# Altium PCB GPS-Module.PcbDoc (part 1 of 2)
Units mil, origin at the board's own origin, x right, y up, seen from the top; angles counter-clockwise.
Board outline 1574.8 x 1665 mil, 4 copper layers (Top Layer, Int1 (GND), Int2 (PWR), Bottom Layer), stack 60.119 mil thick; 48 components, 36 nets, 261 pads, 21 vias.
Unrouted connection lines stored in the file: 132.
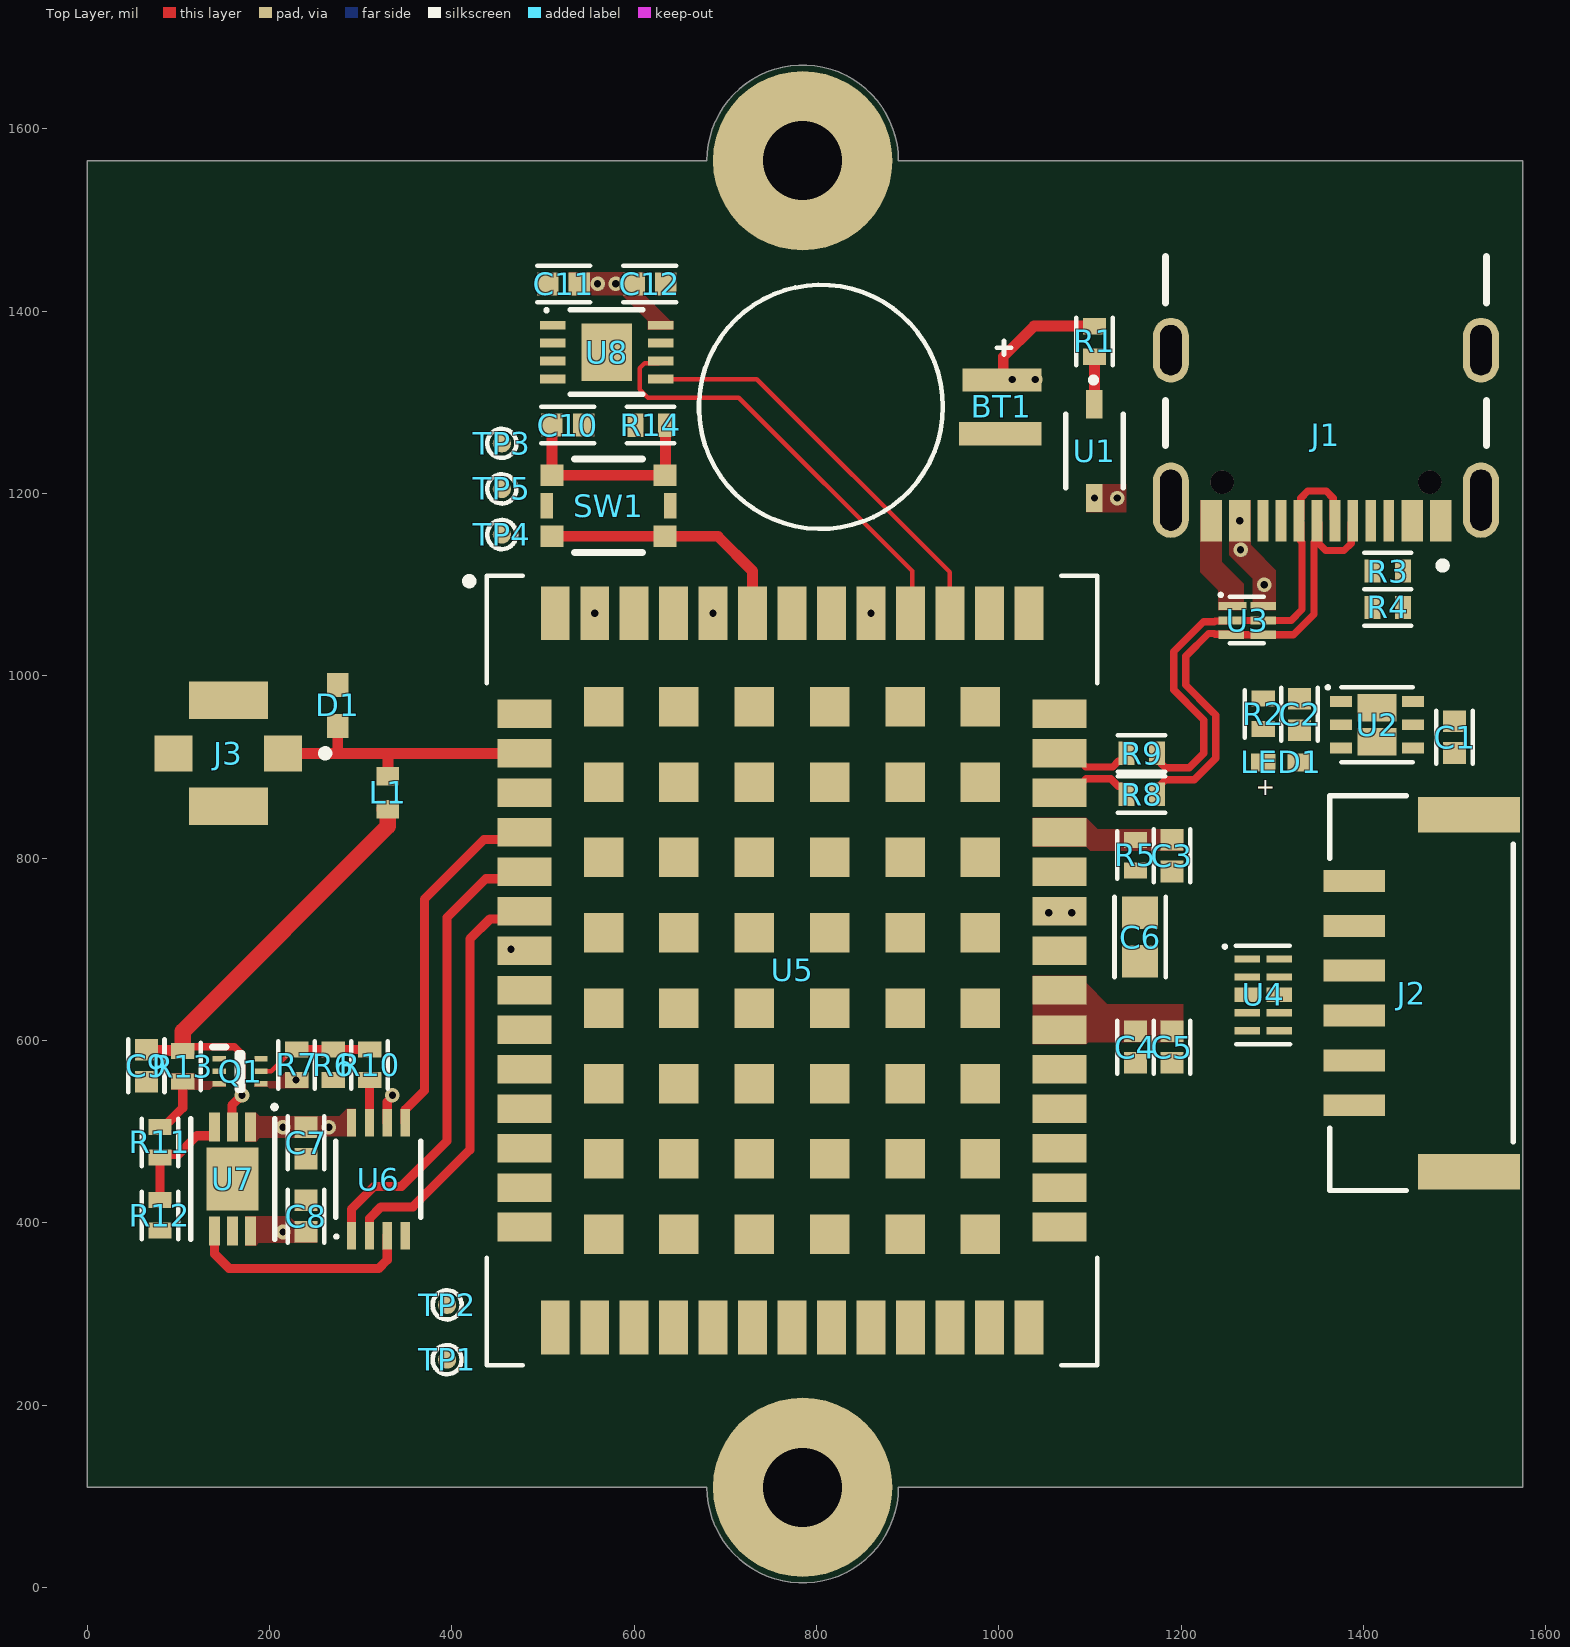
[diagram p0: Top Layer view]
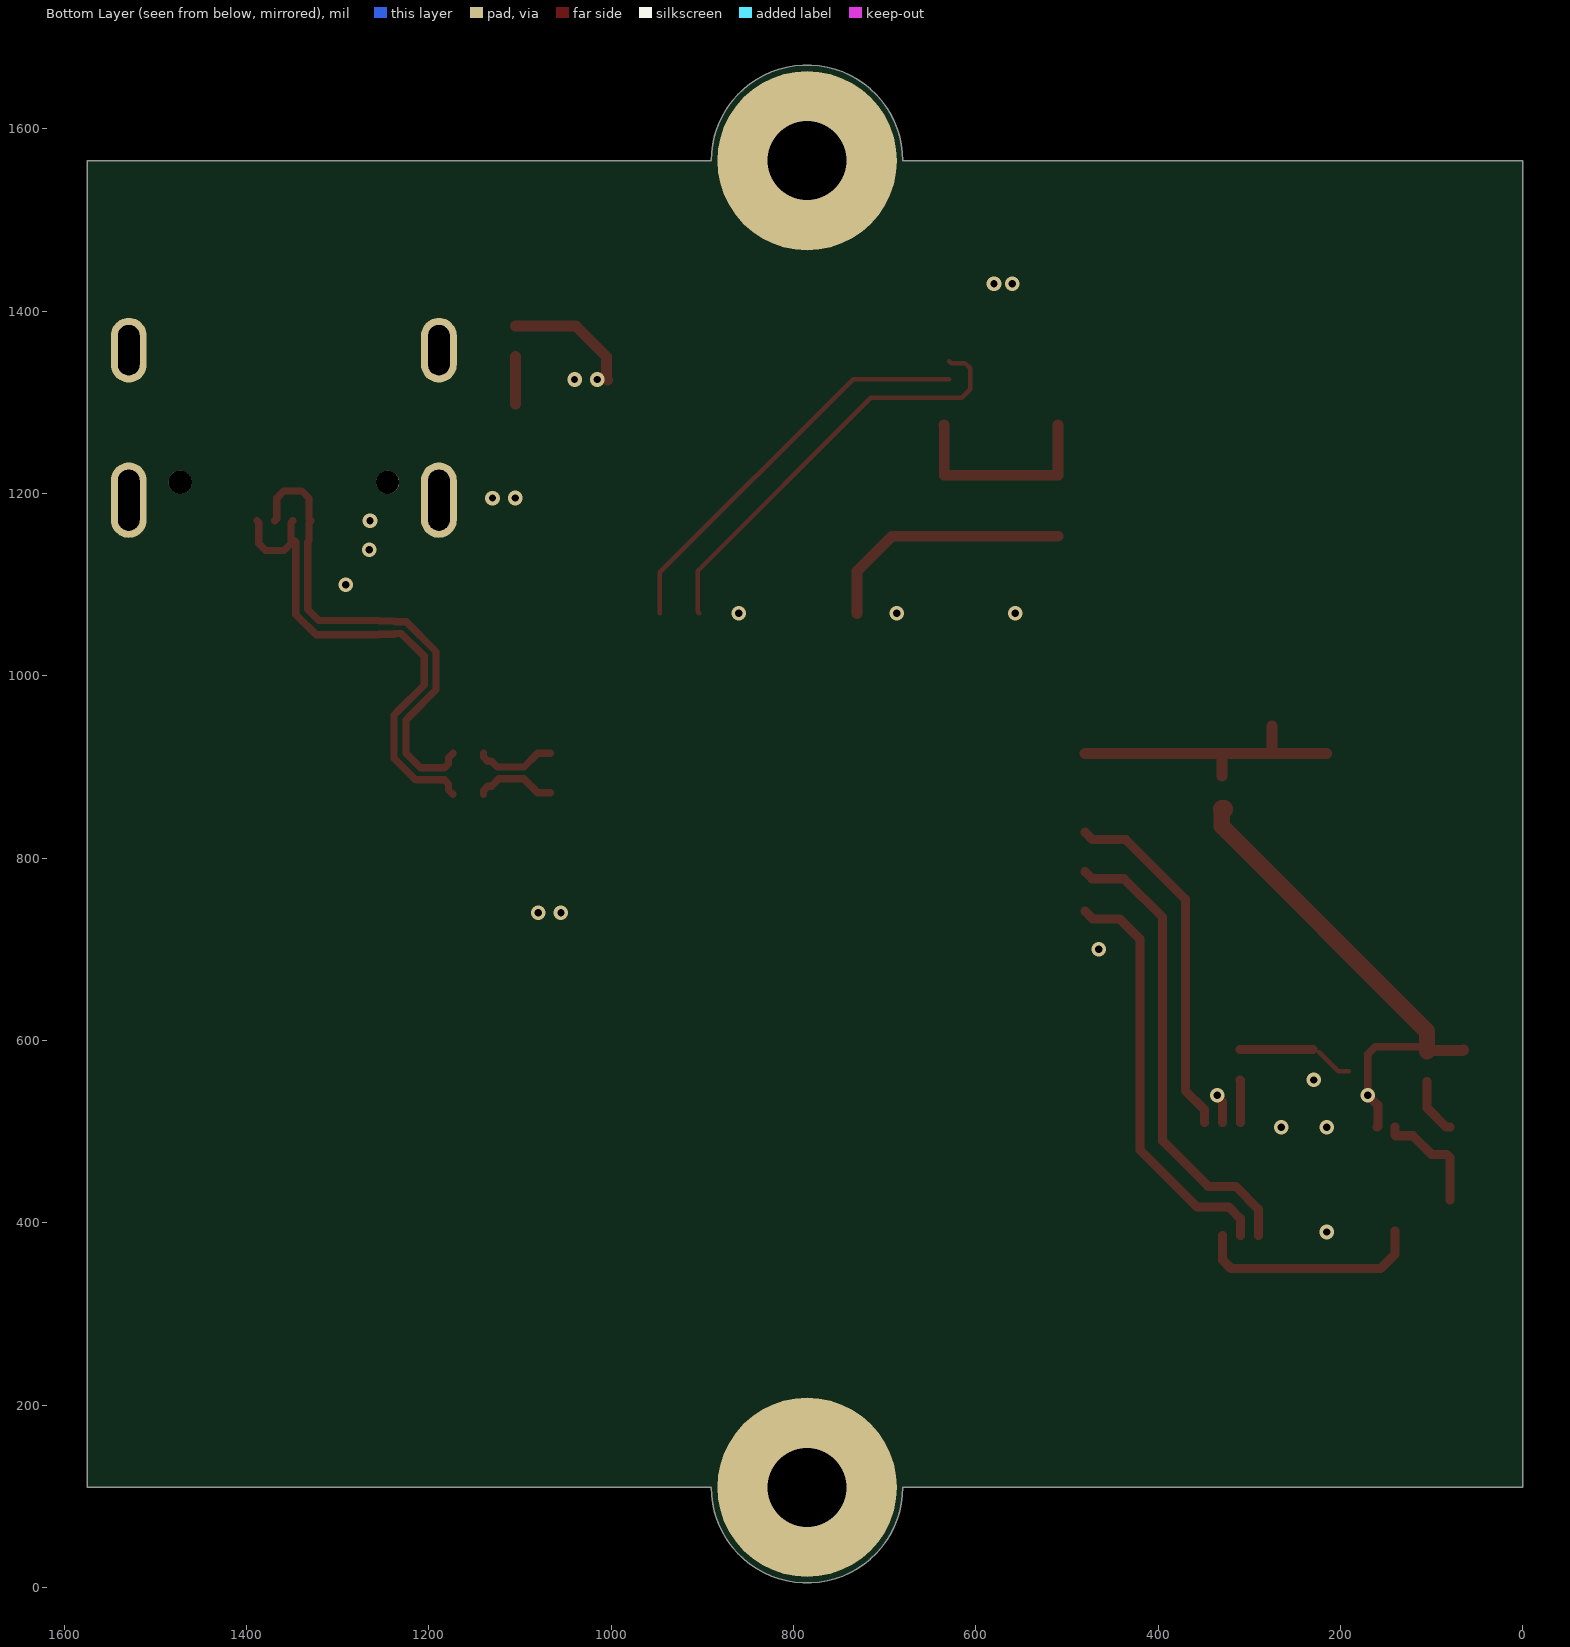
[diagram p1: Bottom Layer view, seen from below]
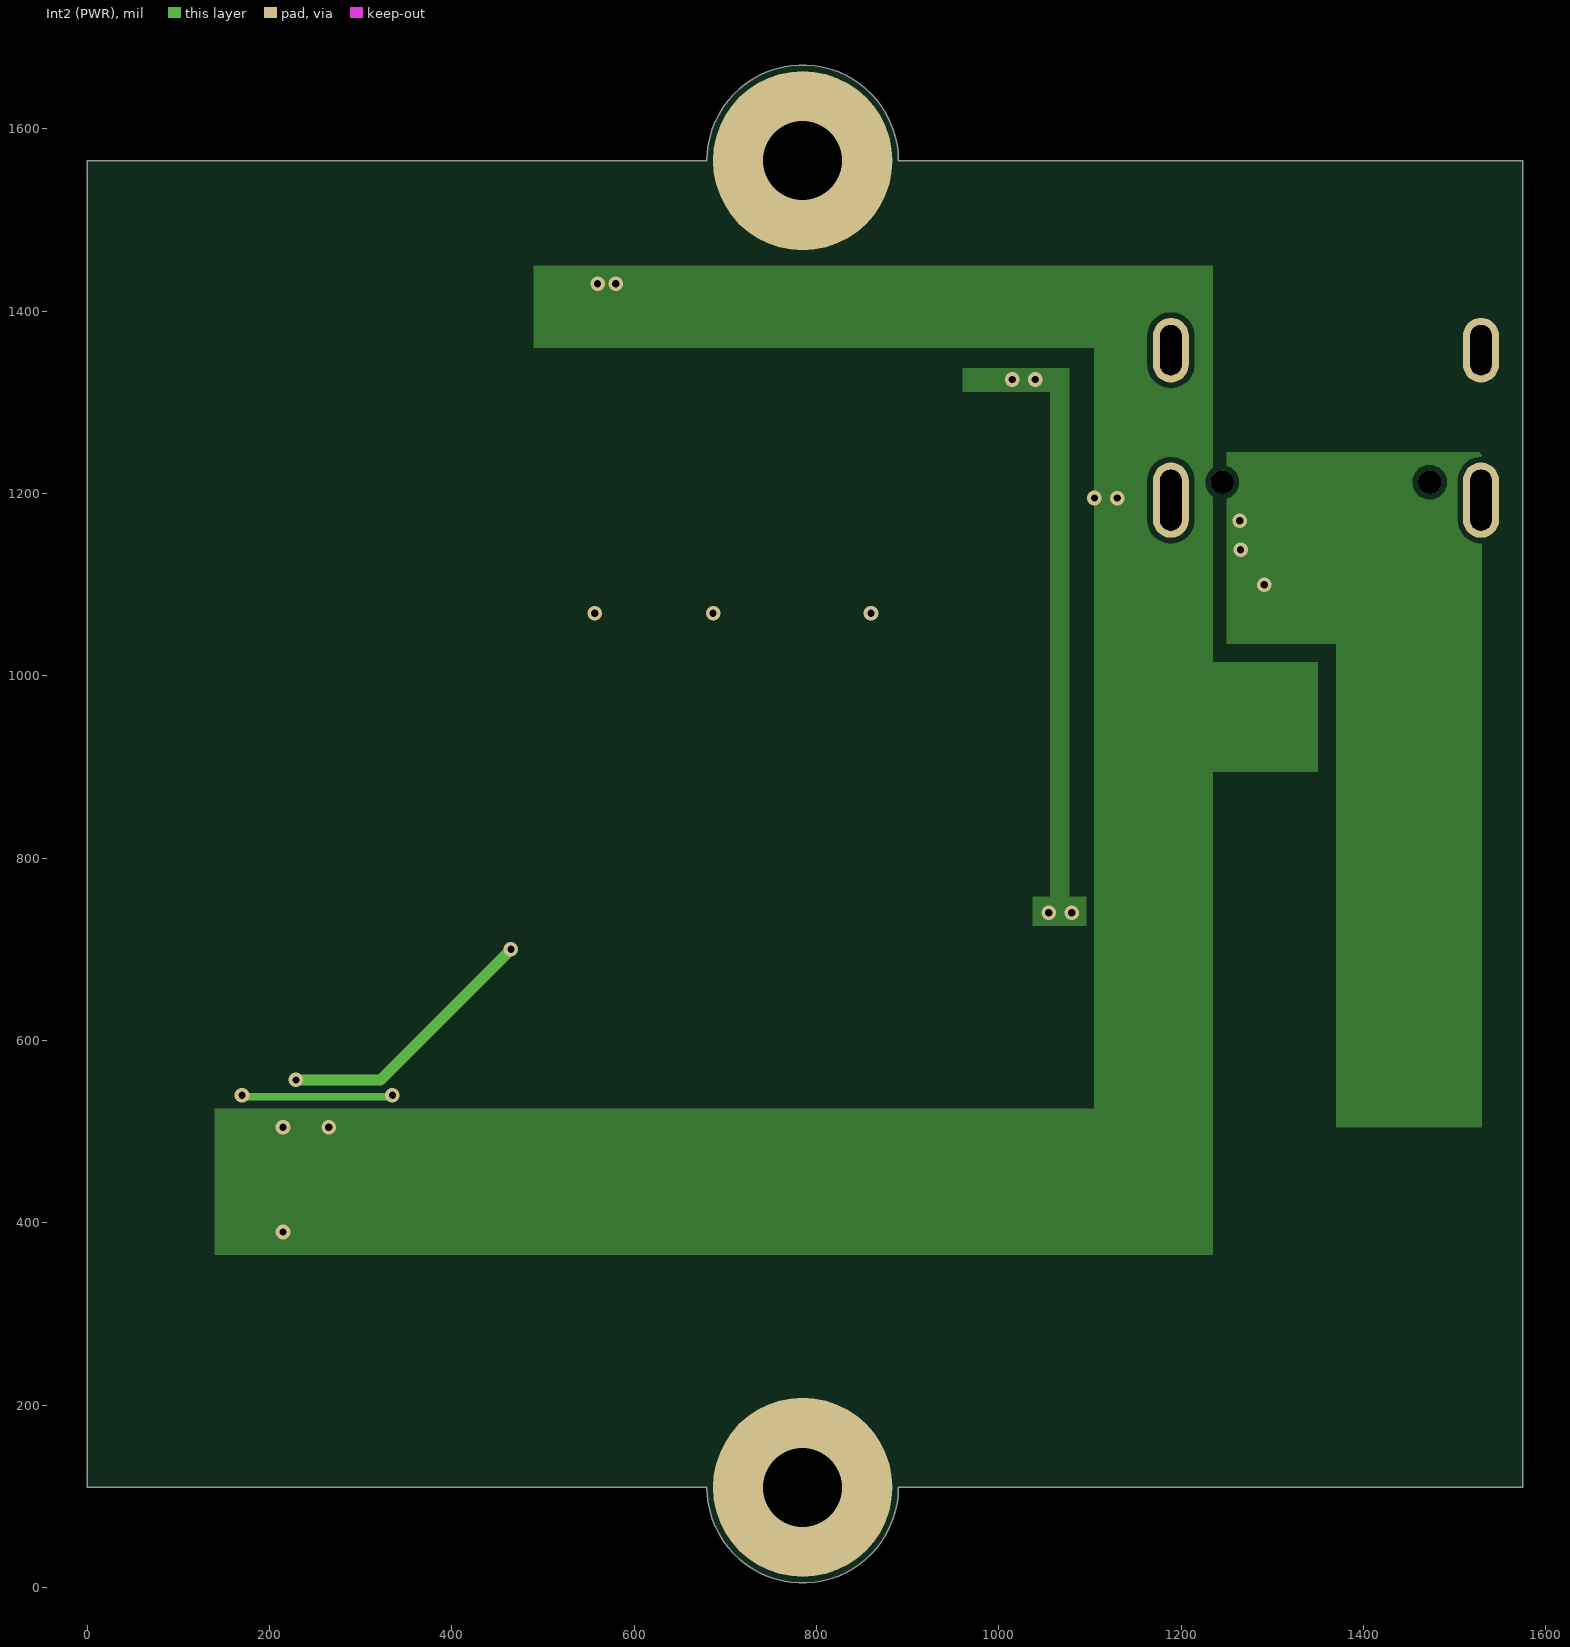
[diagram p2: Int2 (PWR)]

## Layer stack, top to bottom
Top Solder: solder mask 1, SM-001, Dk 4
Top Layer: signal copper 0.689
Dielectric 2: prepreg 7.717, PP-017, Dk 4.74
Int1 (GND): signal copper 1.378
Dielectric 3: core 40.551, Core-039, Dk 4.6
Int2 (PWR): signal copper 1.378
Dielectric 4: prepreg 7.717, PP-017, Dk 4.74
Bottom Layer: signal copper 0.689
Bottom Solder: solder mask 1, SM-001, Dk 4

## Board outline
0,110 680,110 ccw(c785,110) 890,110 1574.8,110 1574.8,1565 890,1565 ccw(c785,1565) 680,1565 0,1565

## Design rules (kind name [scope] priority, off if disabled: settings)
Clearance [All] p1: gap=6 ignorepadtopadclearanceinfootprint=TRUE except(4: Arc-Arc Arc-Track Track-Track)
DiffPairsRouting [All] p1: maxlimit=10 minlimit=5 mostfreqgap=10 toplayer_maxgap=5 toplayer_prefgap=5 toplayer_minwidth=8 toplayer_maxwidth=8 toplayer_prefwidth=8 bottomlayer_maxgap=5 bottomlayer_prefgap=5 bottomlayer_minwidth=8 bottomlayer_maxwidth=8 bottomlayer_prefwidth=8 impedanceprofiledriven=TRUE impedanceprofileid={174DDCCA-AB38-4D93-AAC6-F506CF163EE6} impedanceprofilevalue=90.000000 maxuncoupledlength=500
PolygonConnect [All] p1: connectstyle=Direct reliefconductorwidth=10 reliefentries=4 polygonreliefangle="90 Angle" airgapwidth=10
RoutingVias [All] p1: holewidth=8 width=20 viastyle="Through Hole" minholewidth=6 minwidth=16 maxholewidth=28 maxwidth=50
SolderMaskExpansion [All] p1: expansion=4 istentingtop=FALSE
SupplyNets "Schematic Supply Nets_2" [InNet('VBUS')] p1: voltage=0.000
SupplyNets "Schematic Supply Nets_1" [InNet('GND')] p2: voltage=0.000
SupplyNets "Schematic Supply Nets" [InNet('3V3')] p3: voltage=0.000
Width [All] p1: maxlimit=28 minlimit=4 preferedwidth=10
29 further rules are at their usual default settings.

## Classes and differential pairs
differential pair USB: +USB_P -USB_N
differential pair USBR: +USBR_P -USBR_N

## Components (designator, comment, footprint, x,y, rotation, side; value= is the part's Value field where it differs from the comment)
BT1 "MS621FE-FL11E" BAT_MS621FE-FL11E 805,1295.04 r0 top
C1 "10uF" "CAP 0402_1005" 1500,932.72 r90 top value=10µF
C2 "10uF" "CAP 0402_1005" 1330,957.72 r90 top value=10µF
C3 "1uF" "CAP 0402_1005" 1190,802.72 r90 top value=1µF
C4 "100nF" "CAP 0402_1005" 1150,592.72 r90 top
C5 "1uF" "CAP 0402_1005" 1190,592.72 r90 top value=1µF
C6 "4.7uF" "CAP 0603_1608" 1155,713.46 r270 top value=4.7µF
C7 "1uF" "CAP 0402_1005" 240,487.72 r90 top value=1µF
C8 "1uF" "CAP 0402_1005" 240,407.36 r270 top value=1µF
C9 "10nF" "CAP 0402_1005" 65,572.32 r90 top
C10 "10nF" "CAP 0402_1005" 527.32,1275.04 r180 top
C11 "1uF" "CAP 0402_1005" 522.68,1430 r180 top value=1µF
C12 "100nF" "CAP 0402_1005" 617.32,1430 r0 top
D1 "PESD0402-140" PESD0402-140_LTF 275,967.5 r90 top
J1 "USB4105-GF-A" GCT_USB4105-GF-A 1358.9,1357.24 r180 top
J2 "SM06B-GHS-TB" CONN_SM06B-GHS-TB_JST 1463.85,652.01 r90 top
J3 "CONMHF1-SMD-G-T" LINX_CONMHF1-SMD-G-T 154.96,915.04 r270 top
L1 "120 nH" INDC1005X60N 330,871.89 r270 top
LED1 "VLMB1500-GS08" LED_500-GS08_VIS 1310,905.04 r180 top
Q1 "DMC2990UDJ-7" SOTFL35P100X50-6N 167.91,566.22 r0 top
R1 "3K" "RES 0402_1005" 1105,1366.77 r270 top value=3kΩ
R2 "100R" "RES 0402_1005" 1290,958.31 r90 top value=100Ω
R3 "5K1" "RES 0402_1005" 1426.73,1115 r0 top value=5.1kΩ
R4 "5K1" "RES 0402_1005" 1426.73,1075 r180 top value=5.1kΩ
R5 "100K" "RES 0402_1005" 1150,803.31 r90 top value=100kΩ
R6 "0R" "RES 0402_1005" 270,573.31 r270 top value=0Ω
R7 "100K" "RES 0402_1005" 230,573.31 r270 top value=100kΩ
R8 "27R" "RES 0402_1005" 1156.73,870.04 r0 top value=27Ω
R9 "27R" "RES 0402_1005" 1156.73,915.04 r0 top value=27Ω
R10 "0R" "RES 0402_1005" 310,573.31 r270 top value=0Ω
R11 "1K" "RES 0402_1005" 80,488.27 r90 top value=1kΩ
R12 "100K" "RES 0402_1005" 80,408.27 r90 top value=100kΩ
R13 "18R" "RES 0402_1005" 105,571.73 r270 top value=18Ω
R14 "100R" "RES 0402_1005" 618.27,1275.04 r0 top value=100Ω
SW1 "435151014845" 435151014845 572.01,1186.57 r180 top
TP1 "TEST_POINT" TEST_POINT 395,250 r0 top
TP2 "TEST_POINT" TEST_POINT 395,310 r90 top
TP3 "TEST_POINT" TEST_POINT 455,1255 r90 top
TP4 "TEST_POINT" TEST_POINT 455,1155 r90 top
TP5 "TEST_POINT" TEST_POINT 455,1205 r90 top
U1 "RB751V40T1G" SOD-323_1P8X1P35_ONS 1105,1246.54 r270 top
U2 "NCV8705MT33TCG" WDFN6_2X2_ONS 1415,946.34 r0 top
U3 "ESDR0502NMUTBG" UDFN6_517AA_ONS 1272.5,1060.75 r0 top
U4 "ESD7104MUTAG" UDFN10_ONS_ESD 1290,650.04 r0 top
U5 "ZED-F9P-04B" MODULE_ZED-F9P-04B 773.31,676.85 r270 top
U6 "SN74LVC3G07QDCURQ1" DCU8_TEX_SN74 319.53,448 r90 top
U7 "LT6000CDCB#TRPBF" DFN-6_DCB 159.68,448.04 r270 top
U8 "AT24C512C-MAHM-T" 8MA2_ATM_EEPROM 570,1355 r0 top

## Footprints (in the part's own frame and the unit in brackets; to place one, negate y for a bottom-side part, rotate by r counter-clockwise, add the part's x,y. Pads: shape width x height; smd on the part's side, far side on the other; paste and mask are expansions set on the pad)
8MA2_ATM_EEPROM [mm]
  rect 0.705x0.249 smd paste+0 mask+0: 1(-1.502,0.75) 2(-1.502,0.25) 3(-1.502,-0.25) 4(-1.502,-0.75) 5(1.502,-0.75) 6(1.502,-0.25) 7(1.502,0.25) 8(1.502,0.75)
  rect 1.4x1.6 smd paste+0 mask+0: 9(0,0)
  silkscreen extent -1.7,-1.18 1.01,1.19, body extent -1.55,-1.05 1.55,1.05, height 0.6
435151014845 [mm] "SMD Tact Switch, body 3x2.6mm"
  rect 0.65x0.6 smd mask+0.051: A1(-1.575,0.85) A2(1.575,0.85) B1(-1.575,-0.85) B2(1.575,-0.85)
  rect 0.35x0.7 smd mask+0.051: G1(-1.725,0) G2(1.725,0)
  silkscreen extent -0.95,-1.3 0.95,1.3, body extent -1.75,-1.3 1.75,1.3, height 1.43
BAT_MS621FE-FL11E [mm]
  rect 2.3x0.65 smd: NEG(5,-0.75)
  rect 2.2x0.65 smd: POS(5.05,0.75)
  silkscreen extent -3.4,-3.4 5.3,3.4, body extent -3.4,-3.4 5.9,3.4, height 2.8
"CAP 0402_1005" [mm] "Chip Capacitor, 2-Leads, Body 1.02x0.51mm, IPC Medium Density"
  rect 0.6x0.64 smd mask+0.051: 1(-0.44,0) 2(0.44,0)
  silkscreen extent -0.74,-0.51 0.74,0.51, body extent -0.5,-0.26 0.5,0.26, height 0.52
"CAP 0603_1608" [mm] "Chip Capacitor, 2-Leads, Body 1.60x0.80mm, IPC Medium Density"
  rect 0.9x1 smd: 1(-0.675,0) 2(0.675,0)
  silkscreen extent -1.12,-0.71 1.12,0.71, body extent -0.8,-0.41 0.8,0.41, height 0.82
CONN_SM06B-GHS-TB_JST [mil]
  rect 24x67 smd paste+0 mask+0: 1(-123.03,73.85) 2(-73.82,73.85) 3(-24.61,73.85) 4(24.61,73.85) 5(73.82,73.85) 6(123.03,73.85)
  rect 39x112 smd paste-56 mask-56: 7(-195.87,-52.14) 8(195.87,-52.14)
  silkscreen extent -216,-101 216,101, body extent -212,-95 212,96, height 167
DCU8_TEX_SN74 [mil]
  rect 30x10 smd paste+0 mask+0: 1(-62,29.53) 2(-62,9.84) 3(-62,-9.84) 4(-62,-29.53) 5(62,-29.53) 6(62,-9.84) 7(62,9.84) 8(62,29.53)
  silkscreen extent -64,-46 42,47, body extent -63,-41 63,41, height 35
DFN-6_DCB [mil]
  rect 32x12 smd mask+2: 1(-57,19.68) 2(-57,0) 3(-57,-19.68) 4(57,-19.68) 5(57,0) 6(57,19.68)
  rect 69x57 smd mask+0: 7(0,0)
  silkscreen extent -81,-46 66,48, body extent -59,-39 59,39, height 31
GCT_USB4105-GF-A [mm]
  rect 0.6x1.15 smd mask+0.05: A1_B12(-3.2,4.755) A4_B9(-2.4,4.755) B1_A12(3.2,4.755) B4_A9(2.4,4.755)
  rect 0.3x1.15 smd mask+0.05: A5(-1.25,4.755) A6(-0.25,4.755) A7(0.25,4.755) A8(1.25,4.755) B5(1.75,4.755) B6(0.75,4.755) B7(-0.75,4.755) B8(-1.75,4.755)
  oval 1x2.1 hole 0.6 slot 1.7 at 90 deg: SH1(-4.32,4.18) SH2(4.32,4.18)
  oval 1x1.8 hole 0.6 slot 1.4 at 90 deg: SH3(-4.32,0) SH4(4.32,0)
  round 0.65 hole 0.65 unplated: ""(-2.89,3.68) ""(2.89,3.68)
  silkscreen extent -4.47,-2.6 4.47,6.1, body extent -4.47,-2.6 4.47,5.11, height 3.31
INDC1005X60N [mm]
  rect 0.51x0.63 smd: 1(-0.46,0) 2(0.46,0)
  body extent -0.5,-0.25 0.5,0.25, height 0.6
LED_500-GS08_VIS [mil]
  rect 27x20 smd paste+0 mask+0: 1(-20,0) 2(20,0)
  body extent -20,-10 20,10, height 13
LINX_CONMHF1-SMD-G-T [mm]
  rect 1x1.05 smd: 1(0,1.525) S2(0,-1.525)
  rect 1.05x2.2 smd: S1(-1.475,0) S3(1.475,0)
  silkscreen extent -0.1,2.6 0.1,2.8, body extent -1.5,-1.55 1.5,1.55, height 1.3
MODULE_ZED-F9P-04B [mm]
  rect 0.8x1.5 smd paste-2: 1(-7.15,-7.45) 2(-6.05,-7.45) 3(-4.95,-7.45) 4(-3.85,-7.45) 5(-2.75,-7.45) 6(-1.65,-7.45) 7(-0.55,-7.45) 8(0.55,-7.45) 9(1.65,-7.45) 10(2.75,-7.45) 11(3.85,-7.45) 12(4.95,-7.45) 13(6.05,-7.45) 14(7.15,-7.45) 28(7.15,7.45) 29(6.05,7.45) 30(4.95,7.45) 31(3.85,7.45) 32(2.75,7.45) 33(1.65,7.45) 34(0.55,7.45) 35(-0.55,7.45) 36(-1.65,7.45) 37(-2.75,7.45) 38(-3.85,7.45) 39(-4.95,7.45) 40(-6.05,7.45) 41(-7.15,7.45)
  rect 1.5x0.8 smd paste-2: 15(9.95,-6.6) 16(9.95,-5.5) 17(9.95,-4.4) 18(9.95,-3.3) 19(9.95,-2.2) 20(9.95,-1.1) 21(9.95,0) 22(9.95,1.1) 23(9.95,2.2) 24(9.95,3.3) 25(9.95,4.4) 26(9.95,5.5) 27(9.95,6.6) 42(-9.95,6.6) 43(-9.95,5.5) 44(-9.95,4.4) 45(-9.95,3.3) 46(-9.95,2.2) 47(-9.95,1.1) 48(-9.95,0) 49(-9.95,-1.1) 50(-9.95,-2.2) 51(-9.95,-3.3) 52(-9.95,-4.4) 53(-9.95,-5.5) 54(-9.95,-6.6)
  rect 1.1x1.1 smd paste-0.025: 55(-7.35,-5.25) 56(-7.35,-3.15) 57(-7.35,-1.05) 58(-7.35,1.05) 59(-7.35,3.15) 60(-7.35,5.25) 61(-5.25,-5.25) 62(-5.25,-3.15) 63(-5.25,-1.05) 64(-5.25,1.05) 65(-5.25,3.15) 66(-5.25,5.25) 67(-3.15,-5.25) 68(-3.15,-3.15) 69(-3.15,-1.05) 70(-3.15,1.05) 71(-3.15,3.15) 72(-3.15,5.25) 73(-1.05,-5.25) 74(-1.05,-3.15) 75(-1.05,-1.05) 76(-1.05,1.05) 77(-1.05,3.15) 78(-1.05,5.25) 79(1.05,-5.25) 80(1.05,-3.15) 81(1.05,-1.05) 82(1.05,1.05) 83(1.05,3.15) 84(1.05,5.25) 85(3.15,-5.25) 86(3.15,-3.15) 87(3.15,-1.05) 88(3.15,1.05) 89(3.15,3.15) 90(3.15,5.25) 91(5.25,-5.25) 92(5.25,-3.15) 93(5.25,-1.05) 94(5.25,1.05) 95(5.25,3.15) 96(5.25,5.25) 97(7.35,-5.25) 98(7.35,-3.15) 99(7.35,-1.05) 100(7.35,1.05) 101(7.35,3.15) 102(7.35,5.25)
  silkscreen extent -11,-9.09 11,8.5, body extent -11,-8.5 11,8.5, height 2.6
PESD0402-140_LTF [mil]
  rect 26x24 smd paste+0 mask+0: 1(-22.5,0) 2(22.5,0)
  body extent -20,-10 20,10, height 17
"RES 0402_1005" [mm] "Chip Resistor, 2-Leads, Body 1.0x0.5mm, IPC Medium Density"
  rect 0.45x0.65 smd mask+0.051: 1(-0.425,0) 2(0.425,0)
  silkscreen extent -0.66,-0.51 0.66,0.51, body extent -0.5,-0.25 0.5,0.25, height 0.35
SOD-323_1P8X1P35_ONS [mil]
  rect 31x18 smd paste+0 mask+0: 1(-51.5,0) 2(51.5,0)
  silkscreen extent -79,-32 41,32, body extent -53,-26 53,26, height 39
SOTFL35P100X50-6N [mm]
  rect 0.365x0.15 smd mask+0.051: 1(-0.582,0.35) 2(-0.582,0) 3(-0.582,-0.35) 4(0.582,-0.35) 5(0.582,0) 6(0.582,0.35)
  silkscreen extent -0.76,-0.5 0.05,0.67, body extent -0.5,-0.5 0.5,0.5, height 0.5
TEST_POINT [mil]
  round 20 smd mask+2: 1(0,0)
  silkscreen extent -16,-16 16,16
UDFN6_517AA_ONS [mil]
  rect 31x9 smd paste+0 mask+0: 1(-16,15.75)
  rect 28x9 smd paste+0 mask+0: 2(-17.5,0) 3(-17.5,-15.75) 4(17.5,-15.75) 5(17.5,0) 6(17.5,15.75)
  silkscreen extent -30,-25 18,29, body extent -21,-24 21,24, height 22
UDFN10_ONS_ESD [mil]
  rect 28x8 smd paste+0 mask+0: 1(-17.5,39.37) 2(-17.5,19.68) 4(-17.5,-19.68) 5(-17.5,-39.37) 6(17.5,-39.37) 7(17.5,-19.68) 9(17.5,19.68) 10(17.5,39.37)
  rect 28x16 smd paste+0 mask+0: 3(-17.5,0) 8(17.5,0)
  silkscreen extent -43,-54 30,54, body extent -20,-49 20,49, height 22
WDFN6_2X2_ONS [mil]
  rect 24x12 smd paste+0 mask+0: 1(-39.5,25.59) 2(-39.5,0) 3(-39.5,-25.59) 4(39.5,-25.59) 5(39.5,0) 6(39.5,25.59)
  rect 43x30 smd paste+0 mask+0: 7(0,18.7) 8(0,-18.7)
  silkscreen extent -55,-41 39,42, body extent -39,-39 39,39, height 31

## Part data
BT1: "Coin, 6.8mm 3 V Lithium Battery Rechargeable (Secondary) 5.5mAh", Package="QFP-128 Seiko", Availability="In Stock", Check_prices=https://www.snapeda.com/parts/MS621FE-FL11E/Seiko+Instruments/view-part/?ref=eda, MF="Seiko Instruments", MPN=MS621FE-FL11E, Price=None, Purchase-URL=https://pricing.snapeda.com/search/part/MS621FE-FL11E/?ref=eda, SnapEDA_Link=https://www.snapeda.com/parts/MS621FE-FL11E/Seiko+Instruments/view-part/?ref=snap
C1 C2: library part GRM155R61A106ME11D, "Ceramic Capacitor, Ceramic, 10V, 20% +Tol, 20% -Tol, X5R, 15% TC, 10uF, Surface Mount, 0402", Case/Package=0402, Dielectric=X5R, Dielectric Material=Ceramic, Manufacturer=Murata, Manufacturer Lifecycle Status="IN PRODUCTION", Max Operating Temperature=85°C, Min Operating Temperature=-55°C, Supplier Part Number=490-GRM155R61A106ME11DCT-ND, Tolerance=20%, Voltage Rating=10V, Category="Ceramic Capacitors", ComponentLink1Description=https://datasheet.octopart.com:443/GRM155R61A106ME11D-Murata-datasheet-155239053.pdf?src-supplier=Newark, ComponentLink1URL=https://datasheet.octopart.com:443/GRM155R61A106ME11D-Murata-datasheet-155239053.pdf?src-supplier=Newark, ComponentLink2Description=https://datasheet.octopart.com:443/GRM155R61A106ME11D-Murata-datasheet-178522865.pdf?src-supplier=Arrow.cn, ComponentLink2URL=https://datasheet.octopart.com:443/GRM155R61A106ME11D-Murata-datasheet-178522865.pdf?src-supplier=Arrow.cn, ComponentLink3Description=https://datasheet.octopart.com:443/GRM155R61A106ME11D-Murata-datasheet-165579666.pdf?src-supplier=TME, ComponentLink3URL=https://datasheet.octopart.com:443/GRM155R61A106ME11D-Murata-datasheet-165579666.pdf?src-supplier=TME, ComponentLink4Description=https://datasheet.octopart.com:443/GRM155R61A106ME11D-Murata-datasheet-141266224.pdf?src-supplier=Ciiva, ComponentLink4URL=https://datasheet.octopart.com:443/GRM155R61A106ME11D-Murata-datasheet-141266224.pdf?src-supplier=Ciiva, ComponentLink5Description=https://datasheet.octopart.com:443/GRM155R61A106ME11D-Murata-datasheet-140689744.pdf?src-supplier=Ciiva, ComponentLink5URL=https://datasheet.octopart.com:443/GRM155R61A106ME11D-Murata-datasheet-140689744.pdf?src-supplier=Ciiva, ComponentLink6Description=https://datasheet.octopart.com:443/GRM155R61A106ME11D-Murata-datasheet-138740692.pdf?src-supplier=Ciiva, ComponentLink6URL=https://datasheet.octopart.com:443/GRM155R61A106ME11D-Murata-datasheet-138740692.pdf?src-supplier=Ciiva, ComponentLink7Description=https://datasheet.octopart.com/GRM155R61A106ME11D-Murata-datasheet-12515295.pdf, ComponentLink7URL=https://datasheet.octopart.com/GRM155R61A106ME11D-Murata-datasheet-12515295.pdf, ComponentLink8Description=https://datasheet.octopart.com/GRM155R61A106ME11D-Murata-datasheet-12510076.pdf, ComponentLink8URL=https://datasheet.octopart.com/GRM155R61A106ME11D-Murata-datasheet-12510076.pdf, ComponentLink9Description=https://datasheet.octopart.com/GRM155R61A106ME11D-Murata-datasheet-11978611.pdf, ComponentLink9URL=https://datasheet.octopart.com/GRM155R61A106ME11D-Murata-datasheet-11978611.pdf, ComponentLink10Description=https://datasheet.octopart.com/GRM155R61A106ME11D-Murata-datasheet-10025737.pdf, ComponentLink10URL=https://datasheet.octopart.com/GRM155R61A106ME11D-Murata-datasheet-10025737.pdf, ComponentLink11Description=https://datasheet.octopart.com/GRM155R61A106ME11D-Murata-datasheet-8819587.pdf, ComponentLink11URL=https://datasheet.octopart.com/GRM155R61A106ME11D-Murata-datasheet-8819587.pdf, ComponentLink12Description=http://sigma.octopart.com:80/reach_statement/Murata-company-16.pdf?src-supplier=Compliance+Statements, ComponentLink12URL=http://sigma.octopart.com:80/reach_statement/Murata-company-16.pdf?src-supplier=Compliance+Statements, Height=500µm, Length=1mm, Lifecycle Status=Production, Material=Ceramic, Mounting Technology="Surface Mount", MPN=GRM155R61A106ME11D, Number of Terminals=2, Pricing="1=0.08, 10=0.014 (USD)", REACH SVHC=Yes, RoHS=Compliant, Stock=1548065, Supplier=DigiKey, Thickness=500µm, Voltage Rating (DC)=10V, Width=500µm
C3 C5 C7 C8 C11: library part GRM155C81C105KE11D, "Ceramic Capacitor, Ceramic, 16V, 10% +Tol, 10% -Tol, X6S, 22% TC, 1uF, Surface Mount, 0402", Case Code (Imperial)=0402, Case Code (Metric)=1005, Dielectric=X6S, Dielectric Material=Ceramic, Manufacturer=Murata, Manufacturer Lifecycle Status="IN PRODUCTION", Max Operating Temperature=105°C, Min Operating Temperature=-55°C, Supplier Part Number=490-12700-1-ND, Tolerance=10%, Voltage Rating=16V, Case/Package=0402, Category="Ceramic Capacitors", ComponentLink1Description=https://datasheet.octopart.com:443/GRM155C81C105KE11D-Murata-datasheet-149522934.pdf?src-supplier=Newark, ComponentLink1URL=https://datasheet.octopart.com:443/GRM155C81C105KE11D-Murata-datasheet-149522934.pdf?src-supplier=Newark, ComponentLink2Description=https://datasheet.octopart.com:443/GRM155C81C105KE11D-Murata-datasheet-165579666.pdf?src-supplier=TME, ComponentLink2URL=https://datasheet.octopart.com:443/GRM155C81C105KE11D-Murata-datasheet-165579666.pdf?src-supplier=TME, ComponentLink3Description=https://datasheet.octopart.com:443/GRM155C81C105KE11D-Murata-datasheet-141266224.pdf?src-supplier=Ciiva, ComponentLink3URL=https://datasheet.octopart.com:443/GRM155C81C105KE11D-Murata-datasheet-141266224.pdf?src-supplier=Ciiva, ComponentLink4Description=https://datasheet.octopart.com:443/GRM155C81C105KE11D-Murata-datasheet-140688092.pdf?src-supplier=Ciiva, ComponentLink4URL=https://datasheet.octopart.com:443/GRM155C81C105KE11D-Murata-datasheet-140688092.pdf?src-supplier=Ciiva, ComponentLink5Description=https://datasheet.octopart.com:443/GRM155C81C105KE11D-Murata-datasheet-138740516.pdf?src-supplier=Ciiva, ComponentLink5URL=https://datasheet.octopart.com:443/GRM155C81C105KE11D-Murata-datasheet-138740516.pdf?src-supplier=Ciiva, ComponentLink6Description=https://datasheet.octopart.com:443/GRM155C81C105KE11D-Murata-datasheet-22122223.pdf?src-supplier=Future+Electronics, ComponentLink6URL=https://datasheet.octopart.com:443/GRM155C81C105KE11D-Murata-datasheet-22122223.pdf?src-supplier=Future+Electronics, ComponentLink7Description=https://datasheet.octopart.com/GRM155C81C105KE11D-Murata-datasheet-12515295.pdf, ComponentLink7URL=https://datasheet.octopart.com/GRM155C81C105KE11D-Murata-datasheet-12515295.pdf, ComponentLink8Description=https://datasheet.octopart.com/GRM155C81C105KE11D-Murata-datasheet-12510076.pdf, ComponentLink8URL=https://datasheet.octopart.com/GRM155C81C105KE11D-Murata-datasheet-12510076.pdf, ComponentLink9Description=https://datasheet.octopart.com/GRM155C81C105KE11D-Murata-datasheet-11978611.pdf, ComponentLink9URL=https://datasheet.octopart.com/GRM155C81C105KE11D-Murata-datasheet-11978611.pdf, ComponentLink10Description=https://datasheet.octopart.com/GRM155C81C105KE11D-Murata-datasheet-10025737.pdf, ComponentLink10URL=https://datasheet.octopart.com/GRM155C81C105KE11D-Murata-datasheet-10025737.pdf, ComponentLink11Description=https://datasheet.octopart.com/GRM155C81C105KE11D-Murata-datasheet-8819587.pdf, ComponentLink11URL=https://datasheet.octopart.com/GRM155C81C105KE11D-Murata-datasheet-8819587.pdf, ComponentLink12Description=https://datasheet.octopart.com/GRM155C81C105KE11D-Murata-datasheet-38882735.pdf, ComponentLink12URL=https://datasheet.octopart.com/GRM155C81C105KE11D-Murata-datasheet-38882735.pdf, ComponentLink13Description=http://sigma.octopart.com:80/reach_statement/Murata-company-16.pdf?src-supplier=Compliance+Statements, ComponentLink13URL=http://sigma.octopart.com:80/reach_statement/Murata-company-16.pdf?src-supplier=Compliance+Statements, Composition=Ceramic, Height=500µm, Lead Free="Lead Free", Length=1mm, Lifecycle Status=Production, Material=Ceramic, Mounting Technology="Surface Mount", MPN=GRM155C81C105KE11D, Number of Terminals=2, Packaging="Cut Tape (CT)", Pricing="1=0.1, 10=0.045, 50=0.031, 100=0.0267, 500=0.01938, 1000=0.01713, 2500=0.01478 (USD)", REACH SVHC=Yes, RoHS=Compliant, Schedule B="8532240020, 8532240020|8532240020|8532240020|8532240020|8532240020", Stock=234756, Supplier=DigiKey, Termination=SMD/SMT, Thickness=500µm, Voltage Rating (DC)=16V, Weight=6.010099mg, Width=500µm
C4 C12: library part C0402C104K8RACTU, "Capacitor, Multilayer, Ceramic, 10V, 10%, X7R, 15% Tc, 0.1Uf, Surface Mount, 0402", Case Code (Imperial)=0402, Dielectric=X7R, Dielectric Material=Ceramic, Manufacturer=KEMET, Max Operating Temperature=125°C, Min Operating Temperature=-55°C, Supplier Part Number=399-C0402C104K8RACTUCT-ND, Tolerance=10%, Voltage=10V, Case/Package=0402, Category="Ceramic Capacitors", China RoHS=Compliant, ComponentLink1Description=https://datasheet.octopart.com:443/C0402C104K8RACTU-KEMET-datasheet-178445679.pdf?src-supplier=IHS, ComponentLink1URL=https://datasheet.octopart.com:443/C0402C104K8RACTU-KEMET-datasheet-178445679.pdf?src-supplier=IHS, ComponentLink2Description=https://datasheet.octopart.com:443/C0402C104K8RACTU-KEMET-datasheet-137357759.pdf?src-supplier=Farnell, ComponentLink2URL=https://datasheet.octopart.com:443/C0402C104K8RACTU-KEMET-datasheet-137357759.pdf?src-supplier=Farnell, ComponentLink3Description=https://datasheet.octopart.com:443/C0402C104K8RACTU-KEMET-datasheet-149521634.pdf?src-supplier=Farnell, ComponentLink3URL=https://datasheet.octopart.com:443/C0402C104K8RACTU-KEMET-datasheet-149521634.pdf?src-supplier=Farnell, ComponentLink4Description=https://datasheet.octopart.com:443/C0402C104K8RACTU-Kemet-datasheet-12608295.pdf?src-supplier=Farnell, ComponentLink4URL=https://datasheet.octopart.com:443/C0402C104K8RACTU-Kemet-datasheet-12608295.pdf?src-supplier=Farnell, ComponentLink5Description=https://datasheet.octopart.com:443/C0402C104K8RACTU-Kemet-datasheet-11992184.pdf?src-supplier=Farnell, ComponentLink5URL=https://datasheet.octopart.com:443/C0402C104K8RACTU-Kemet-datasheet-11992184.pdf?src-supplier=Farnell, ComponentLink6Description=https://datasheet.octopart.com:443/C0402C104K8RACTU-Kemet-datasheet-10942409.pdf?src-supplier=Farnell, ComponentLink6URL=https://datasheet.octopart.com:443/C0402C104K8RACTU-Kemet-datasheet-10942409.pdf?src-supplier=Farnell, ComponentLink7Description=https://datasheet.octopart.com:443/C0402C104K8RACTU-Kemet-datasheet-10404442.pdf?src-supplier=Farnell, ComponentLink7URL=https://datasheet.octopart.com:443/C0402C104K8RACTU-Kemet-datasheet-10404442.pdf?src-supplier=Farnell, ComponentLink8Description=https://datasheet.octopart.com:443/C0402C104K8RACTU-KEMET-datasheet-101575473.pdf?src-supplier=Farnell, ComponentLink8URL=https://datasheet.octopart.com:443/C0402C104K8RACTU-KEMET-datasheet-101575473.pdf?src-supplier=Farnell, ComponentLink9Description=https://datasheet.octopart.com:443/C0402C104K8RACTU-Kemet-datasheet-41232427.pdf?src-supplier=Farnell, ComponentLink9URL=https://datasheet.octopart.com:443/C0402C104K8RACTU-Kemet-datasheet-41232427.pdf?src-supplier=Farnell, ComponentLink10Description=https://datasheet.octopart.com:443/C0402C104K8RACTU-Kemet-datasheet-32036385.pdf?src-supplier=Electro+Sonic, ComponentLink10URL=https://datasheet.octopart.com:443/C0402C104K8RACTU-Kemet-datasheet-32036385.pdf?src-supplier=Electro+Sonic, ComponentLink11Description=https://datasheet.octopart.com:443/C0402C104K8RACTU-KEMET-datasheet-157246124.pdf?src-supplier=Electro+Sonic, ComponentLink11URL=https://datasheet.octopart.com:443/C0402C104K8RACTU-KEMET-datasheet-157246124.pdf?src-supplier=Electro+Sonic, ComponentLink12Description=https://datasheet.octopart.com:443/C0402C104K8RACTU-Kemet-datasheet-27203261.pdf?src-supplier=Newark, ComponentLink12URL=https://datasheet.octopart.com:443/C0402C104K8RACTU-Kemet-datasheet-27203261.pdf?src-supplier=Newark, ComponentLink13Description=https://datasheet.octopart.com:443/C0402C104K8RACTU-KEMET-datasheet-176289274.pdf?src-supplier=Newark, ComponentLink13URL=https://datasheet.octopart.com:443/C0402C104K8RACTU-KEMET-datasheet-176289274.pdf?src-supplier=Newark, ComponentLink14Description=https://datasheet.octopart.com:443/C0402C104K8RACTU-Kemet-datasheet-5313890.pdf?src-supplier=element14, ComponentLink14URL=https://datasheet.octopart.com:443/C0402C104K8RACTU-Kemet-datasheet-5313890.pdf?src-supplier=element14, ComponentLink15Description=https://datasheet.octopart.com:443/C0402C104K8RACTU-Kemet-datasheet-8764837.pdf?src-supplier=element14, ComponentLink15URL=https://datasheet.octopart.com:443/C0402C104K8RACTU-Kemet-datasheet-8764837.pdf?src-supplier=element14, ComponentLink16Description=https://datasheet.octopart.com:443/C0402C104K8RACTU-Kemet-datasheet-8480123.pdf?src-supplier=element14, ComponentLink16URL=https://datasheet.octopart.com:443/C0402C104K8RACTU-Kemet-datasheet-8480123.pdf?src-supplier=element14, ComponentLink17Description=https://datasheet.octopart.com:443/C0402C104K8RACTU-Kemet-datasheet-5390537.pdf?src-supplier=element14, ComponentLink17URL=https://datasheet.octopart.com:443/C0402C104K8RACTU-Kemet-datasheet-5390537.pdf?src-supplier=element14, ComponentLink18Description=https://datasheet.octopart.com:443/C0402C104K8RACTU-Kemet-datasheet-5393970.pdf?src-supplier=element14, ComponentLink18URL=https://datasheet.octopart.com:443/C0402C104K8RACTU-Kemet-datasheet-5393970.pdf?src-supplier=element14, ComponentLink19Description=https://datasheet.octopart.com:443/C0402C104K8RACTU-Kemet-datasheet-8502025.pdf?src-supplier=element14, ComponentLink19URL=https://datasheet.octopart.com:443/C0402C104K8RACTU-Kemet-datasheet-8502025.pdf?src-supplier=element14, ComponentLink20Description=https://datasheet.octopart.com:443/C0402C104K8RACTU-Kemet-datasheet-7541751.pdf?src-supplier=element14, ComponentLink20URL=https://datasheet.octopart.com:443/C0402C104K8RACTU-Kemet-datasheet-7541751.pdf?src-supplier=element14, ComponentLink21Description=https://datasheet.octopart.com:443/C0402C104K8RACTU-Kemet-datasheet-161801.pdf?src-supplier=element14, ComponentLink21URL=https://datasheet.octopart.com:443/C0402C104K8RACTU-Kemet-datasheet-161801.pdf?src-supplier=element14, ComponentLink22Description=https://datasheet.octopart.com:443/C0402C104K8RACTU-KEMET-datasheet-164512540.pdf?src-supplier=TME, ComponentLink22URL=https://datasheet.octopart.com:443/C0402C104K8RACTU-KEMET-datasheet-164512540.pdf?src-supplier=TME, ComponentLink23Description=https://datasheet.octopart.com:443/C0402C104K8RACTU-KEMET-datasheet-98355703.pdf?src-supplier=TME, ComponentLink23URL=https://datasheet.octopart.com:443/C0402C104K8RACTU-KEMET-datasheet-98355703.pdf?src-supplier=TME, ComponentLink24Description=https://datasheet.octopart.com:443/C0402C104K8RACTU-KEMET-datasheet-68331906.pdf?src-supplier=TME, ComponentLink24URL=https://datasheet.octopart.com:443/C0402C104K8RACTU-KEMET-datasheet-68331906.pdf?src-supplier=TME, ComponentLink25Description=https://datasheet.octopart.com:443/C0402C104K8RACTU-KEMET-datasheet-110724412.pdf?src-supplier=RS+(Formerly+Allied+Electronics), ComponentLink25URL=https://datasheet.octopart.com:443/C0402C104K8RACTU-KEMET-datasheet-110724412.pdf?src-supplier=RS+(Formerly+Allied+Electronics), ComponentLink26Description=https://datasheet.octopart.com:443/C0402C104K8RACTU-Kemet-datasheet-464.pdf?src-supplier=RS+(Formerly+Allied+Electronics), ComponentLink26URL=https://datasheet.octopart.com:443/C0402C104K8RACTU-Kemet-datasheet-464.pdf?src-supplier=RS+(Formerly+Allied+Electronics), ComponentLink27Description=https://datasheet.octopart.com/C0402C104K8RACTU-KEMET-datasheet-84169754.pdf, ComponentLink27URL=https://datasheet.octopart.com/C0402C104K8RACTU-KEMET-datasheet-84169754.pdf, ComponentLink28Description=https://datasheet.octopart.com:443/C0402C104K8RACTU-Kemet-datasheet-11890967.pdf?src-supplier=Arrow+Electronics, ComponentLink28URL=https://datasheet.octopart.com:443/C0402C104K8RACTU-Kemet-datasheet-11890967.pdf?src-supplier=Arrow+Electronics, ComponentLink29Description=https://datasheet.octopart.com:443/C0402C104K8RAC-TU-Kemet-datasheet-7553948.pdf?src-supplier=Jameco, ComponentLink29URL=https://datasheet.octopart.com:443/C0402C104K8RAC-TU-Kemet-datasheet-7553948.pdf?src-supplier=Jameco, Depth=500µm, Dissipation Factor=5%, Height=500µm, Lead Free="Lead Free", Lead Pitch=300µm, Length=1mm, Lifecycle Status=Production, Material=Ceramic, Mounting Technology="Surface Mount", MPN=C0402C104K8RACTU, Number of Terminals=2, Packaging="Cut Tape", Pins=2, Pricing="1=0.1, 10=0.029, 50=0.0198, 100=0.0168, 500=0.01192, 1000=0.01043, 2500=0.00886, 5000=0.00792 (USD)", Radiation Hardening=No, REACH SVHC=Yes, RoHS=Compliant, Schedule B="8532240020, 8532240020|8532240020|8532240020|8532240020|8532240020", Stock=3340670, Supplier=DigiKey, Termination=SMD/SMT, Thickness=558.8µm, Voltage Rating=10V, Voltage Rating (DC)=10V, Width=500µm
C6: library part CC0603KRX5R5BB475, "Multilayer Ceramic Capacitor, CC Series, 4.7 - F, - 10%, X5R, 6.3 V, 0603 [1608 Metric]", Case Code (Imperial)=0603, Case Code (Metric)=1608, Dielectric=X5R, Dielectric Material=Ceramic, Manufacturer="Yageo Group", Max Operating Temperature=85°C, Min Operating Temperature=-55°C, Supplier Part Number=311-1521-1-ND, Tolerance=10%, Voltage Rating=6.3V, Case/Package=0603, Category="Ceramic Capacitors", China RoHS=Compliant, ComponentLink1Description=https://datasheet.octopart.com:443/CC0603KRX5R5BB475-Yageo-datasheet-170350636.pdf?src-supplier=IHS, ComponentLink1URL=https://datasheet.octopart.com:443/CC0603KRX5R5BB475-Yageo-datasheet-170350636.pdf?src-supplier=IHS, ComponentLink2Description=https://datasheet.octopart.com:443/CC0603KRX5R5BB475-Yageo-datasheet-82288757.pdf?src-supplier=Upverter, ComponentLink2URL=https://datasheet.octopart.com:443/CC0603KRX5R5BB475-Yageo-datasheet-82288757.pdf?src-supplier=Upverter, ComponentLink3Description=https://datasheet.octopart.com:443/CC0603KRX5R5BB475-Yageo-datasheet-78855687.pdf?src-supplier=Upverter, ComponentLink3URL=https://datasheet.octopart.com:443/CC0603KRX5R5BB475-Yageo-datasheet-78855687.pdf?src-supplier=Upverter, ComponentLink4Description=https://datasheet.octopart.com:443/CC0603KRX5R5BB475-Yageo-datasheet-42079887.pdf?src-supplier=Upverter, ComponentLink4URL=https://datasheet.octopart.com:443/CC0603KRX5R5BB475-Yageo-datasheet-42079887.pdf?src-supplier=Upverter, ComponentLink5Description=https://datasheet.octopart.com:443/CC0603KRX5R5BB475-Yageo-datasheet-184398204.pdf?src-supplier=Newark, ComponentLink5URL=https://datasheet.octopart.com:443/CC0603KRX5R5BB475-Yageo-datasheet-184398204.pdf?src-supplier=Newark, ComponentLink6Description=https://datasheet.octopart.com:443/CC0603KRX5R5BB475-Yageo-datasheet-181968509.pdf?src-supplier=Newark, ComponentLink6URL=https://datasheet.octopart.com:443/CC0603KRX5R5BB475-Yageo-datasheet-181968509.pdf?src-supplier=Newark, ComponentLink7Description=https://datasheet.octopart.com:443/CC0603KRX5R5BB475-Yageo-datasheet-158238148.pdf?src-supplier=Newark, ComponentLink7URL=https://datasheet.octopart.com:443/CC0603KRX5R5BB475-Yageo-datasheet-158238148.pdf?src-supplier=Newark, ComponentLink8Description=https://datasheet.octopart.com:443/CC0603KRX5R5BB475-Yageo-datasheet-8359971.pdf?src-supplier=Newark, ComponentLink8URL=https://datasheet.octopart.com:443/CC0603KRX5R5BB475-Yageo-datasheet-8359971.pdf?src-supplier=Newark, ComponentLink9Description=https://datasheet.octopart.com:443/CC0603KRX5R5BB475-Yageo-datasheet-8324442.pdf?src-supplier=element14+APAC, ComponentLink9URL=https://datasheet.octopart.com:443/CC0603KRX5R5BB475-Yageo-datasheet-8324442.pdf?src-supplier=element14+APAC, ComponentLink10Description=https://datasheet.octopart.com:443/CC0603KRX5R5BB475-Yageo-datasheet-62067349.pdf?src-supplier=element14+APAC, ComponentLink10URL=https://datasheet.octopart.com:443/CC0603KRX5R5BB475-Yageo-datasheet-62067349.pdf?src-supplier=element14+APAC, ComponentLink11Description=https://datasheet.octopart.com/CC0603KRX5R5BB475-Yageo-datasheet-86397281.pdf, ComponentLink11URL=https://datasheet.octopart.com/CC0603KRX5R5BB475-Yageo-datasheet-86397281.pdf, ComponentLink12Description=https://datasheet.octopart.com:443/CC0603KRX5R5BB475-Yageo-datasheet-10911834.pdf?src-supplier=Farnell, ComponentLink12URL=https://datasheet.octopart.com:443/CC0603KRX5R5BB475-Yageo-datasheet-10911834.pdf?src-supplier=Farnell, ComponentLink13Description=https://datasheet.octopart.com:443/CC0603KRX5R5BB475-Yageo-Group-datasheet-184398209.pdf?src-supplier=Farnell, ComponentLink13URL=https://datasheet.octopart.com:443/CC0603KRX5R5BB475-Yageo-Group-datasheet-184398209.pdf?src-supplier=Farnell, ComponentLink14Description=https://datasheet.octopart.com:443/CC0603KRX5R5BB475-Yageo-datasheet-500777.pdf?src-supplier=Farnell, ComponentLink14URL=https://datasheet.octopart.com:443/CC0603KRX5R5BB475-Yageo-datasheet-500777.pdf?src-supplier=Farnell, ComponentLink15Description=https://datasheet.octopart.com:443/CC0603KRX5R5BB475-Yageo-datasheet-519481.pdf?src-supplier=element14, ComponentLink15URL=https://datasheet.octopart.com:443/CC0603KRX5R5BB475-Yageo-datasheet-519481.pdf?src-supplier=element14, ComponentLink16Description=https://datasheet.octopart.com:443/CC0603KRX5R5BB475-Yageo-datasheet-8701639.pdf?src-supplier=element14, ComponentLink16URL=https://datasheet.octopart.com:443/CC0603KRX5R5BB475-Yageo-datasheet-8701639.pdf?src-supplier=element14, ComponentLink17Description=https://datasheet.octopart.com:443/CC0603KRX5R5BB475-Yageo-datasheet-175963154.pdf?src-supplier=JRH+Electronics, ComponentLink17URL=https://datasheet.octopart.com:443/CC0603KRX5R5BB475-Yageo-datasheet-175963154.pdf?src-supplier=JRH+Electronics, ComponentLink18Description=https://datasheet.octopart.com:443/CC0603KRX5R5BB475-Yageo-datasheet-149070021.pdf?src-supplier=TME, ComponentLink18URL=https://datasheet.octopart.com:443/CC0603KRX5R5BB475-Yageo-datasheet-149070021.pdf?src-supplier=TME, ComponentLink19Description=https://datasheet.octopart.com:443/CC0603KRX5R5BB475-Yageo-Group-datasheet-145016144.pdf?src-supplier=ODG+(Origin+Data+Global), ComponentLink19URL=https://datasheet.octopart.com:443/CC0603KRX5R5BB475-Yageo-Group-datasheet-145016144.pdf?src-supplier=ODG+(Origin+Data+Global), ComponentLink20Description=https://datasheet.octopart.com:443/CC0603KRX5R5BB475-Yageo-datasheet-137875056.pdf?src-supplier=Future+Electronics, ComponentLink20URL=https://datasheet.octopart.com:443/CC0603KRX5R5BB475-Yageo-datasheet-137875056.pdf?src-supplier=Future+Electronics, ComponentLink21Description=https://datasheet.octopart.com:443/CC0603KRX5R5BB475-Yageo-datasheet-137700082.pdf?src-supplier=Future+Electronics, ComponentLink21URL=https://datasheet.octopart.com:443/CC0603KRX5R5BB475-Yageo-datasheet-137700082.pdf?src-supplier=Future+Electronics, ComponentLink22Description=https://datasheet.octopart.com:443/CC0603KRX5R5BB475-Yageo-datasheet-137700085.pdf?src-supplier=Future+Electronics, ComponentLink22URL=https://datasheet.octopart.com:443/CC0603KRX5R5BB475-Yageo-datasheet-137700085.pdf?src-supplier=Future+Electronics, ComponentLink23Description=https://datasheet.octopart.com:443/CC0603KRX5R5BB475-Yageo-datasheet-59875459.pdf?src-supplier=Future+Electronics, ComponentLink23URL=https://datasheet.octopart.com:443/CC0603KRX5R5BB475-Yageo-datasheet-59875459.pdf?src-supplier=Future+Electronics, ComponentLink24Description=https://datasheet.octopart.com:443/CC0603KRX5R5BB475-Yageo-datasheet-27626583.pdf?src-supplier=Future+Electronics, ComponentLink24URL=https://datasheet.octopart.com:443/CC0603KRX5R5BB475-Yageo-datasheet-27626583.pdf?src-supplier=Future+Electronics, ComponentLink25Description=https://datasheet.octopart.com:443/CC0603KRX5R5BB475-Yageo-datasheet-15895757.pdf?src-supplier=Future+Electronics, ComponentLink25URL=https://datasheet.octopart.com:443/CC0603KRX5R5BB475-Yageo-datasheet-15895757.pdf?src-supplier=Future+Electronics, ComponentLink26Description=https://datasheet.octopart.com:443/CC0603KRX5R5BB475-Yageo-datasheet-14389981.pdf?src-supplier=Future+Electronics, ComponentLink26URL=https://datasheet.octopart.com:443/CC0603KRX5R5BB475-Yageo-datasheet-14389981.pdf?src-supplier=Future+Electronics, ComponentLink27Description=http://sigma.octopart.com:80/rohs_statement/Yageo-company-2.pdf?src-supplier=Compliance+Statements, ComponentLink27URL=http://sigma.octopart.com:80/rohs_statement/Yageo-company-2.pdf?src-supplier=Compliance+Statements, ComponentLink28Description=http://sigma.octopart.com:80/conflict_mineral_statement/Yageo-company-3.pdf?src-supplier=Compliance+Statements, ComponentLink28URL=http://sigma.octopart.com:80/conflict_mineral_statement/Yageo-company-3.pdf?src-supplier=Compliance+Statements, Composition=Ceramic, Depth=800µm, Dissipation Factor=10%, Halogen Free="Halogen Free", Height=800µm, Lead Free="Lead Free", Length=1.6mm, Lifecycle Status=Production, Material=Ceramic, Mounting Technology="Surface Mount", MPN=CC0603KRX5R5BB475, Number of Terminals=2, Pins=2, Pricing="1=0.2, 10=0.114, 50=0.0814, 100=0.0714, 500=0.0545, 1000=0.04931 (USD)", Radiation Hardening=No, REACH SVHC=Yes, RoHS=Compliant, Schedule B="8532240020, 8532240020|8532240020, 8532240020|8532240020|8532240020, 8532240020|8532240020|8532240020|8532240020", Stock=76894, Supplier=DigiKey, Termination=SMD/SMT, Thickness=889µm, Voltage Rating (AC)=6.3V, Voltage Rating (DC)=6.3V, Width=800µm
C9: library part GRM155R71C103KA01D, "0402 10000 pF 16 V ±10% Tolerance X7R Multilayer Ceramic Chip Capacitor", Case Code (Imperial)=0402, Case Code (Metric)=1005, Dielectric=X7R, Dielectric Material=Ceramic, Manufacturer=Murata, Manufacturer Lifecycle Status=NRND, Max Operating Temperature=125°C, Min Operating Temperature=-55°C, Supplier Part Number=490-1313-1-ND, Tolerance=10%, Voltage=16V, Case/Package=0402, Category="Ceramic Capacitors", ComponentLink1Description=https://datasheet.octopart.com:443/GRM155R71C103KA01D-Murata-datasheet-8817987.pdf?src-supplier=element14+APAC, ComponentLink1URL=https://datasheet.octopart.com:443/GRM155R71C103KA01D-Murata-datasheet-8817987.pdf?src-supplier=element14+APAC, ComponentLink2Description=https://datasheet.octopart.com:443/GRM155R71C103KA01D-Murata-datasheet-62317116.pdf?src-supplier=element14+APAC, ComponentLink2URL=https://datasheet.octopart.com:443/GRM155R71C103KA01D-Murata-datasheet-62317116.pdf?src-supplier=element14+APAC, ComponentLink3Description=https://datasheet.octopart.com:443/GRM155R71C103KA01D-Murata-datasheet-12547956.pdf?src-supplier=_legacy+Avnet, ComponentLink3URL=https://datasheet.octopart.com:443/GRM155R71C103KA01D-Murata-datasheet-12547956.pdf?src-supplier=_legacy+Avnet, ComponentLink4Description=https://datasheet.octopart.com:443/GRM155R71C103KA01D-Murata-datasheet-8330587.pdf?src-supplier=_legacy+Avnet, ComponentLink4URL=https://datasheet.octopart.com:443/GRM155R71C103KA01D-Murata-datasheet-8330587.pdf?src-supplier=_legacy+Avnet, ComponentLink5Description=https://datasheet.octopart.com:443/GRM155R71C103KA01D-Murata-datasheet-165579666.pdf?src-supplier=TME, ComponentLink5URL=https://datasheet.octopart.com:443/GRM155R71C103KA01D-Murata-datasheet-165579666.pdf?src-supplier=TME, ComponentLink6Description=https://datasheet.octopart.com:443/GRM155R71C103KA01D-Murata-datasheet-59876780.pdf?src-supplier=TME, ComponentLink6URL=https://datasheet.octopart.com:443/GRM155R71C103KA01D-Murata-datasheet-59876780.pdf?src-supplier=TME, ComponentLink7Description=https://datasheet.octopart.com:443/GRM155R71C103KA01D-Murata-datasheet-141266224.pdf?src-supplier=Ciiva, ComponentLink7URL=https://datasheet.octopart.com:443/GRM155R71C103KA01D-Murata-datasheet-141266224.pdf?src-supplier=Ciiva, ComponentLink8Description=https://datasheet.octopart.com:443/GRM155R71C103KA01D-Murata-datasheet-140690969.pdf?src-supplier=Ciiva, ComponentLink8URL=https://datasheet.octopart.com:443/GRM155R71C103KA01D-Murata-datasheet-140690969.pdf?src-supplier=Ciiva, ComponentLink9Description=https://datasheet.octopart.com:443/GRM155R71C103KA01D-Murata-datasheet-138740887.pdf?src-supplier=Ciiva, ComponentLink9URL=https://datasheet.octopart.com:443/GRM155R71C103KA01D-Murata-datasheet-138740887.pdf?src-supplier=Ciiva, ComponentLink10Description=https://datasheet.octopart.com:443/GRM155R71C103KA01D-Murata-datasheet-22122223.pdf?src-supplier=Future+Electronics, ComponentLink10URL=https://datasheet.octopart.com:443/GRM155R71C103KA01D-Murata-datasheet-22122223.pdf?src-supplier=Future+Electronics, ComponentLink11Description=https://datasheet.octopart.com:443/GRM155R71C103KA01D-Murata-datasheet-14400559.pdf?src-supplier=Future+Electronics, ComponentLink11URL=https://datasheet.octopart.com:443/GRM155R71C103KA01D-Murata-datasheet-14400559.pdf?src-supplier=Future+Electronics, ComponentLink12Description=https://datasheet.octopart.com:443/GRM155R71C103KA01D-Murata-datasheet-44106282.pdf?src-supplier=Future+Electronics, ComponentLink12URL=https://datasheet.octopart.com:443/GRM155R71C103KA01D-Murata-datasheet-44106282.pdf?src-supplier=Future+Electronics, ComponentLink13Description=https://datasheet.octopart.com/GRM155R71C103KA01D-Murata-datasheet-12515295.pdf, ComponentLink13URL=https://datasheet.octopart.com/GRM155R71C103KA01D-Murata-datasheet-12515295.pdf, ComponentLink14Description=https://datasheet.octopart.com/GRM155R71C103KA01D-Murata-datasheet-12510076.pdf, ComponentLink14URL=https://datasheet.octopart.com/GRM155R71C103KA01D-Murata-datasheet-12510076.pdf, ComponentLink15Description=https://datasheet.octopart.com/GRM155R71C103KA01D-Murata-datasheet-11978611.pdf, ComponentLink15URL=https://datasheet.octopart.com/GRM155R71C103KA01D-Murata-datasheet-11978611.pdf, ComponentLink16Description=https://datasheet.octopart.com/GRM155R71C103KA01D-Murata-datasheet-10025737.pdf, ComponentLink16URL=https://datasheet.octopart.com/GRM155R71C103KA01D-Murata-datasheet-10025737.pdf, ComponentLink17Description=https://datasheet.octopart.com/GRM155R71C103KA01D-Murata-datasheet-8819587.pdf, ComponentLink17URL=https://datasheet.octopart.com/GRM155R71C103KA01D-Murata-datasheet-8819587.pdf, ComponentLink18Description=https://datasheet.octopart.com/GRM155R71C103KA01D-Murata-datasheet-14400564.pdf, ComponentLink18URL=https://datasheet.octopart.com/GRM155R71C103KA01D-Murata-datasheet-14400564.pdf, ComponentLink19Description=https://datasheet.octopart.com:443/GRM155R71C103KA01D-Murata-datasheet-148211.pdf?src-supplier=Garrett, ComponentLink19URL=https://datasheet.octopart.com:443/GRM155R71C103KA01D-Murata-datasheet-148211.pdf?src-supplier=Garrett, ComponentLink20Description=https://datasheet.octopart.com:443/GRM155R71C103KA01D-Murata-datasheet-102.pdf?src-supplier=DigiKey, ComponentLink20URL=https://datasheet.octopart.com:443/GRM155R71C103KA01D-Murata-datasheet-102.pdf?src-supplier=DigiKey, ComponentLink21Description=http://sigma.octopart.com:80/reach_statement/Murata-company-16.pdf?src-supplier=Compliance+Statements, ComponentLink21URL=http://sigma.octopart.com:80/reach_statement/Murata-company-16.pdf?src-supplier=Compliance+Statements, Depth=500µm, Height=500µm, Lead Free="Lead Free", Length=1mm, Lifecycle Status=NRND, Material=Ceramic, Mounting Technology="Surface Mount", MPN=GRM155R71C103KA01D, Number of Terminals=2, Packaging="Cut Tape", Pins=2, Pricing="1=0.08, 10=0.004 (USD)", Radiation Hardening=No, REACH SVHC=Yes, RoHS=Compliant, Schedule B="8532240020, 8532240020|8532240020, 8532240020|8532240020|8532240020, 8532240020|8532240020|8532240020|8532240020", Stock=7038790, Supplier=DigiKey, Termination=SMD/SMT, Thickness=500µm, Voltage Rating=16V, Voltage Rating (DC)=16V, Width=500µm
C10: library part C0402C103K3REC7411, "Multilayer Ceramic Capacitors MLCC - SMD/SMT 25V 0.01uF X7R 0402 10%", Dielectric Material=Ceramic, Manufacturer=KEMET, Max Operating Temperature=125°C, Min Operating Temperature=-55°C, Supplier Part Number=399-C0402C103K3REC7411CT-ND, Voltage Rating (DC)=25V, Category="Ceramic Capacitors", China RoHS=Compliant, ComponentLink1Description=https://datasheet.octopart.com:443/C0402C103K3REC7411-KEMET-datasheet-178568699.pdf?src-supplier=IHS, ComponentLink1URL=https://datasheet.octopart.com:443/C0402C103K3REC7411-KEMET-datasheet-178568699.pdf?src-supplier=IHS, Height=500µm, Length=1mm, Lifecycle Status=Production, Mounting Technology="Surface Mount", MPN=C0402C103K3REC7411, Number of Terminals=2, Pricing="1=0.1, 10=0.056, 50=0.039, 100=0.0336, 500=0.02468, 1000=0.02195, 2500=0.01906, 5000=0.01733 (USD)", REACH SVHC=Yes, RoHS=Compliant, Stock=41610, Supplier=DigiKey, Width=500µm
D1: "TVS DIODE 14VWM 40VC 0402", Manufacturer_Name="Littelfuse Inc", Copyright="Copyright (C) 2025 Ultra Librarian. All rights reserved.", MPN=PESD0402-140
J1: "CONN RCP USB2.0 TYP C 24P SMD RA", Package=None, Availability=Unavailable, MF="{'manufacturer': u'GCT'}", MPN=USB4105-GF-A, Price=None
J2: "CONN HEADER SMD R/A 6POS 1.25MM", Manufacturer_Name=JST, Copyright="Copyright (C) 2025 Ultra Librarian. All rights reserved.", MPN=SM06B-GHS-TB, RefDes=RefDes, Type=Type
J3: "U.FL/MHF1 Jack 50 Ohm PCB Surface Mount", Package=None, Check_prices=https://www.snapeda.com/parts/CONMHF1-SMD-G-T/TE+Connectivity/view-part/?ref=eda, MF="TE Connectivity", MPN=CONMHF1-SMD-G-T, SnapEDA_Link=https://www.snapeda.com/parts/CONMHF1-SMD-G-T/TE+Connectivity/view-part/?ref=snap
L1: library part LQW15ANR12J00D, "Inductor with Inductance: 120nH Tol. +/-5%, Package: 0402 _1005_", Package="1005 Murata", Digi-Key_Part_Number=490-4091-1-ND, Digi-Key_Purchase_URL=https://www.digikey.com.au/product-detail/en/murata-electronics/LQW15ANR12J00D/490-4091-1-ND/1016351?utm_source=snapeda&utm_medium=aggregator&utm_campaign=symbol, MF=Murata, MPN=LQW15ANR12J00D, SnapEDA_Link=https://www.snapeda.com/parts/LQW15ANR12J00D/Murata%20Electronics%20North%20America/view-part/494424/?ref=snap
LED1: "CHIPLED(0402) BLUE ULTRABRIGHT -e4", Manufacturer_Name=Vishay, Copyright="Copyright (C) 2025 Ultra Librarian. All rights reserved.", MPN=VLMB1500-GS08
Q1: "Complem. Pair Enhancement MOSFET SOT-963", Manufacturer_Name="Diodes Incorporated", Mouser Part Number=621-DMC2990UDJ-7, Datasheet Link=https://www.diodes.com//assets/Datasheets/DMC2990UDJ.pdf, Geometry.Height=0.5mm, Mouser Price/Stock=https://www.mouser.co.uk/ProductDetail/Diodes-Incorporated/DMC2990UDJ-7?qs=T%2FOtf55vL7d00qRGlt4Fcw%3D%3D, MPN=DMC2990UDJ-7